# Altium PCB uMultimeter_ExpProbeA_Pcb.PcbDoc
Units mil, origin at the board's own origin, x right, y up, seen from the top; angles counter-clockwise.
Board outline 725 x 1000 mil, 2 copper layers (Top Layer, Bottom Layer); 7 components, 14 nets, 30 pads, 2 vias.
Unrouted connection lines stored in the file: 1.
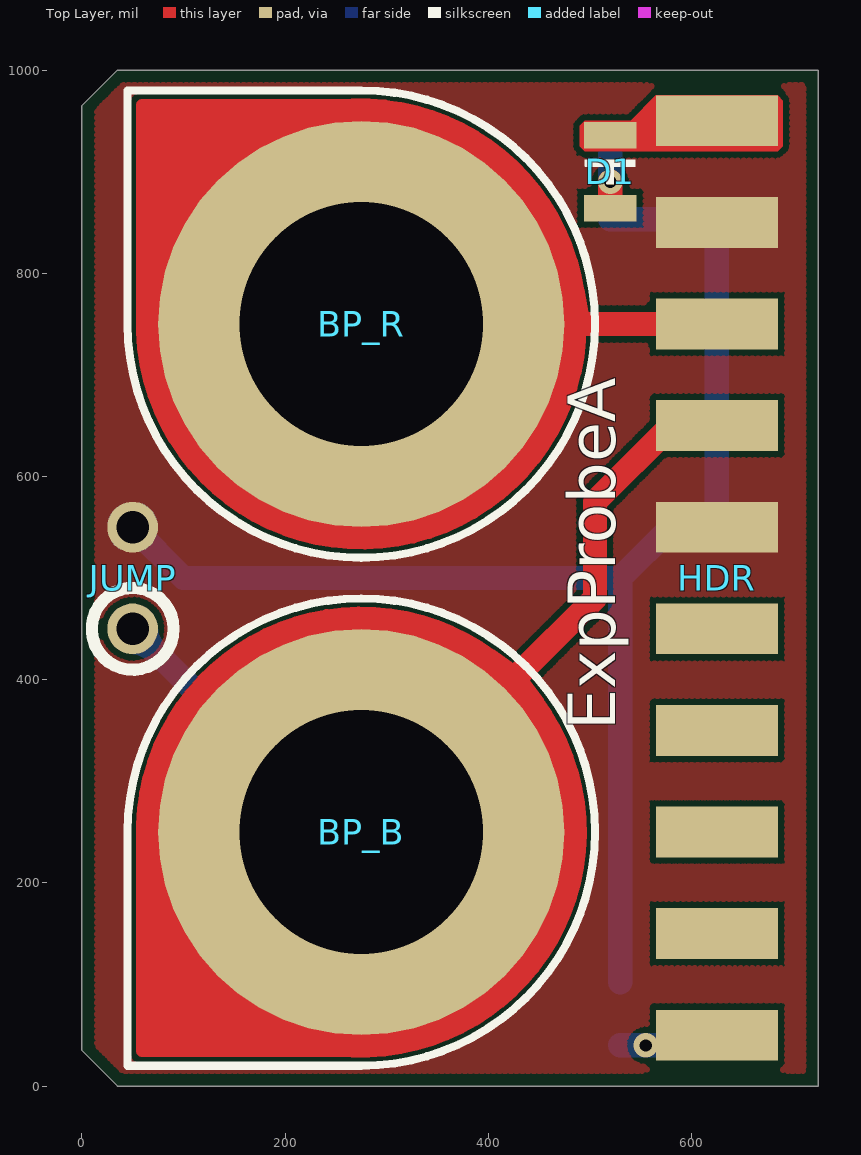
[diagram p0: Top Layer view]
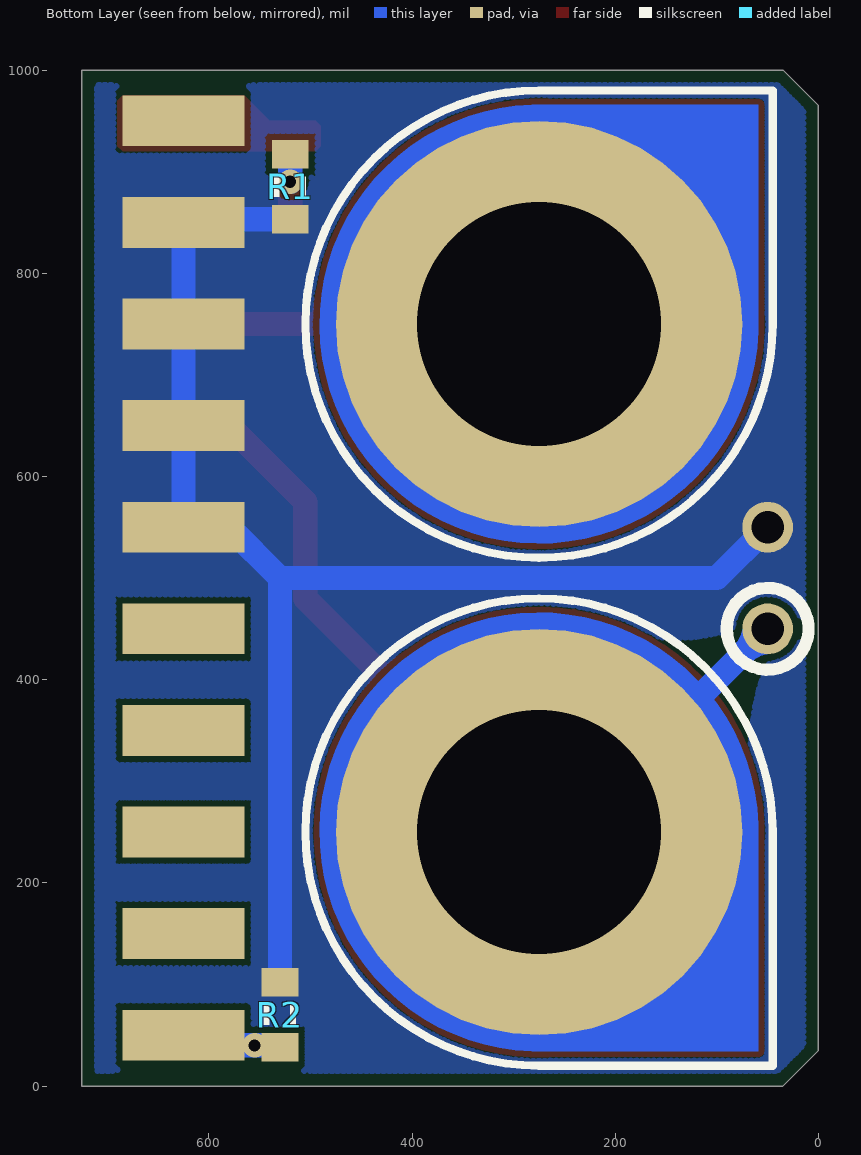
[diagram p1: Bottom Layer view, seen from below]
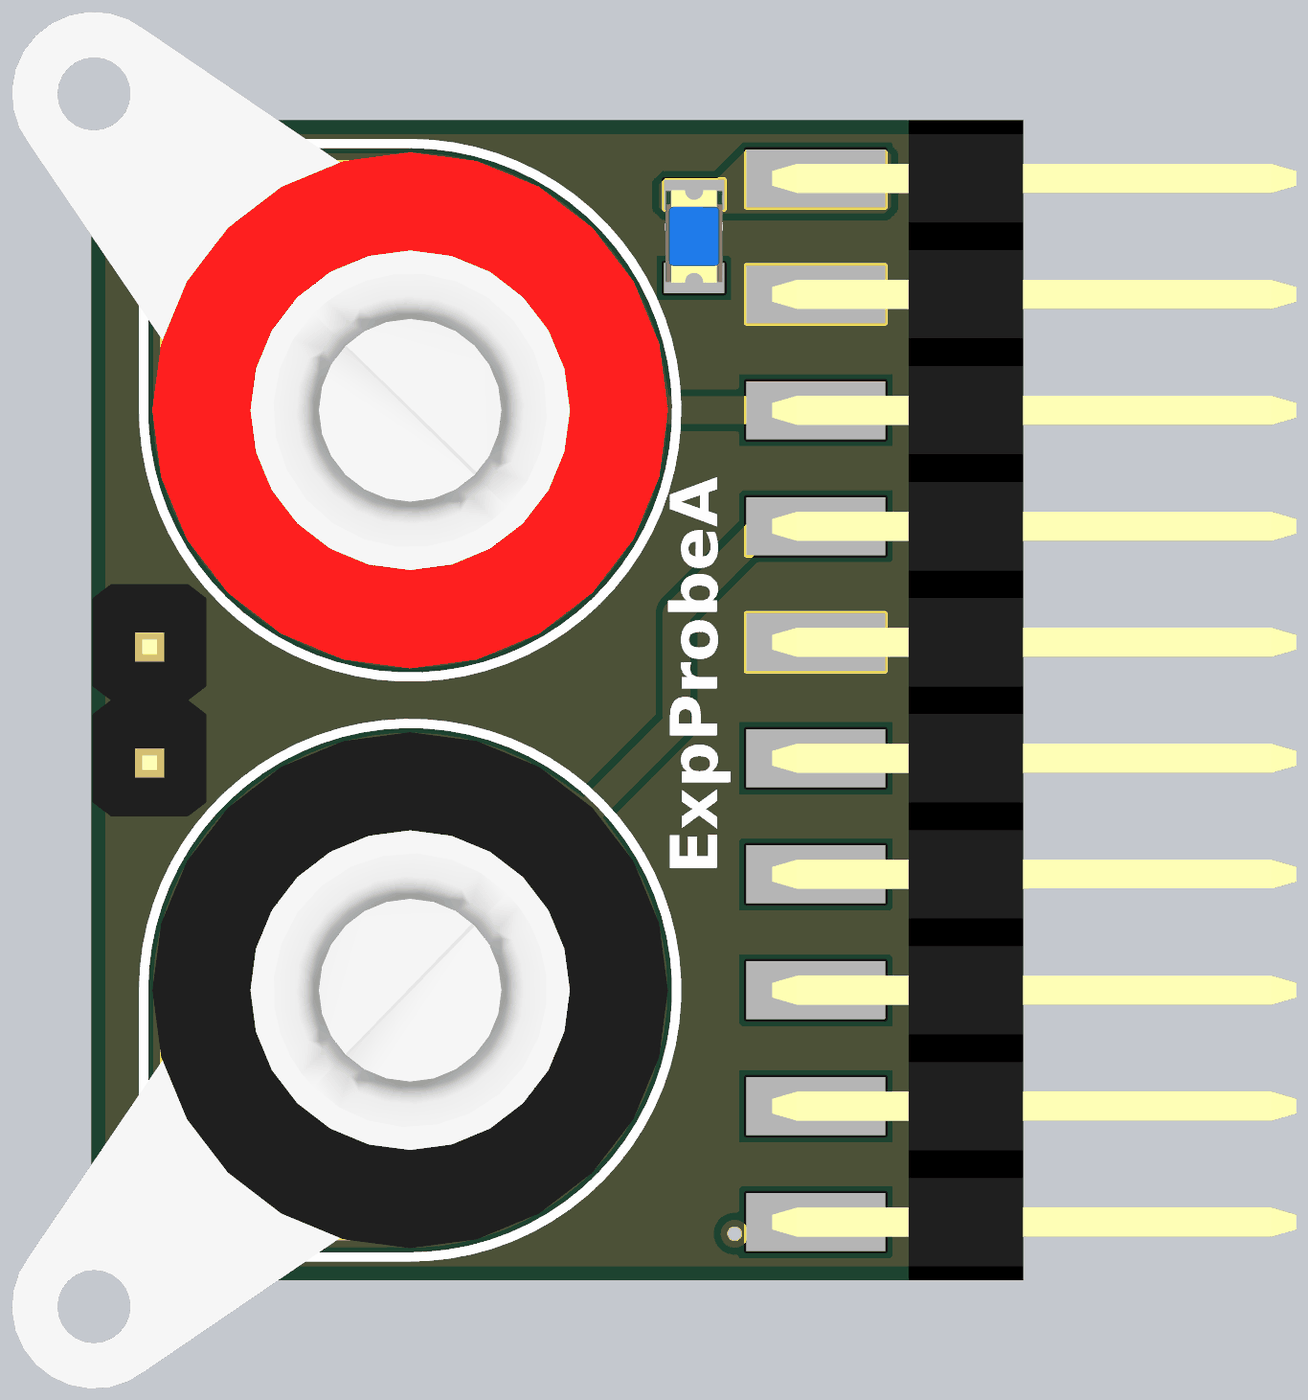
[diagram p2: 3D render of the assembled board from above, using the file's embedded part models]

## Layer stack, top to bottom
Top Solder: solder mask 0.4, Solder Resist, Dk 3.5
Top Layer: signal copper 1.4
Dielectric1: dielectric 12.6, FR-4, Dk 4.8
Bottom Layer: signal copper 1.4
Bottom Solder: solder mask 0.4, Solder Resist, Dk 3.5

## Board outline
0,35 35,0 725,0 725,1000 35,1000 0,965

## Design rules (kind name [scope] priority, off if disabled: settings)
Clearance ClearancePolygon [InPolygon] p1: gap=6
Clearance [All] p2: gap=6
ComponentClearance [All] p1: gap=0 collisioncheckmode=3 verticalgap=0 showdistances=FALSE
Height [All] p1: minheight=0 maxheight=5000 prefheight=500
HoleSize [All] p1: absolutevalues=TRUE maxlimit=200 minlimit=1 maxpercent=80.000 minpercent=20.000
HoleToHoleClearance [All] p1: gap=6 allowstackedmicrovias=TRUE
MinimumSolderMaskSliver [All] p1: minsoldermaskwidth=4
PlaneConnect [All] p1: planeconnectstyle=Direct reliefexpansion=20 reliefentries=4 reliefconductorwidth=20 reliefairgap=10
PolygonConnect [All] p1: connectstyle=Direct reliefconductorwidth=20 reliefentries=4 polygonreliefangle="90 Angle" airgapwidth=10
RoutingVias [All] p1: holewidth=12 width=20 viastyle="Through Hole" minholewidth=12 minwidth=20 maxholewidth=100 maxwidth=200
SilkToSilkClearance [All] p1: silktosilkclearance=0
SilkToSolderMaskClearance SilkscreenOverComponentPads [IsPad] p1: minsilkscreentomaskgap=1 clearancetoexposedcopper=TRUE
SolderMaskExpansion [All] p1: expansion=2
Width [All] p1: maxlimit=64 minlimit=6 preferedwidth=10
22 further rules are at their usual default settings.

## Classes and differential pairs
component class uMultimeter_ExpProbeA_Sch: BP_B BP_R D1 JUMP R1 R2
component class EXP: HDR

## Components (designator, comment, footprint, x,y, rotation, side; value= is the part's Value field where it differs from the comment)
BP_B "BananaPlugs" BananaPlugs_Black 275,250 r225 top
BP_R "BananaPlugs" BananaPlugs_Red 275,750 r135 top
D1 "LED_0805" LED_0805_BLUE 520,900 r270 top
HDR "HDR2x10_2.54" HDR2X10_2.54_180H 625,950 r0 top
JUMP "HDR1x2_2.54" HDR1X2_2.54_180 50,450 r180 top
R1 "Res_0603" RES_0603 520,885 r270 bottom
R2 "Res_0603" RES_0603 530,70 r270 bottom

## Footprints (in the part's own frame and the unit in brackets; to place one, negate y for a bottom-side part, rotate by r counter-clockwise, add the part's x,y. Pads: shape width x height; smd on the part's side, far side on the other; paste and mask are expansions set on the pad)
BananaPlugs_Black [mil]
  round 400 hole 240: 1(0,0)
  Top Layer region: 158.64,-146.59 73.2,-203.22 -28.73,-214.08 -124.19,-176.73 -191.68,-99.58 -216,0 -191.68,99.58 -124.19,176.73 -28.73,214.08 73.2,203.22 158.64,146.59 158.64,146.59 159,146 305,0
  Top Layer lines w12: 158.64,-146.59 cw(c0,0) -216,0 cw(c0,0) 158.64,146.59 ; 159,-146 305,0 159,146
  Bottom Layer region: 158.64,-146.59 73.2,-203.22 -28.73,-214.08 -124.19,-176.73 -191.68,-99.58 -216,0 -191.68,99.58 -124.19,176.73 -28.73,214.08 73.2,203.22 158.64,146.59 158.64,146.59 159,146 305,0
  silkscreen extent -230,-230 325,230, body extent -222,-222 457,222, height 327
BananaPlugs_Red [mil]
  round 400 hole 240: 1(0,0)
  Top Layer region: 158.64,-146.59 73.2,-203.22 -28.73,-214.08 -124.19,-176.73 -191.68,-99.58 -216,0 -191.68,99.58 -124.19,176.73 -28.73,214.08 73.2,203.22 158.64,146.59 158.64,146.59 159,146 305,0
  Top Layer lines w12: 158.64,146.59 ccw(c0,0) -152.74,-152.74 ccw(c0,0) 158.64,-146.59 ; 159,146 305,0 159,-146
  Bottom Layer region: 158.64,-146.59 73.2,-203.22 -28.73,-214.08 -124.19,-176.73 -191.68,-99.58 -216,0 -191.68,99.58 -124.19,176.73 -28.73,214.08 73.2,203.22 158.64,146.59 158.64,146.59 159,146 305,0
  silkscreen extent -230,-230 325,230, body extent -222,-222 457,222, height 327
HDR1X2_2.54_180 [mil]
  round 50 hole 32: 1(0,0) 2(0,-100)
  body extent -49,-150 49,50, height 323
HDR2X10_2.54_180H [mil]
  rect 120x50 smd: 1(0,0) 3(0,-100) 5(0,-200) 7(0,-300) 9(0,-400) 11(0,-500) 13(0,-600) 15(0,-700) 17(0,-800) 19(0,-900)
  rect 120x50 smd far side: 2(0,0) 4(0,-100) 6(0,-200) 8(0,-300) 10(0,-400) 12(0,-500) 14(0,-600) 16(0,-700) 18(0,-800) 20(0,-900)
  body extent -38,-950 415,50, height 100
LED_0805_BLUE [mil]
  rect 26x52 smd: 1(-36,0) 2(36,0)
  silkscreen extent -12,-25 12,24, body extent -40,-25 40,25, height 43
RES_0603 [mil]
  rect 28x36 smd: 1(-32,0) 2(32,0)
  silkscreen extent -10,-16 10,16, body extent -31,-16 32,16, height 20

## Part data
D1: "LED"
HDR: "Header"
JUMP: library part HDR1x2_2.54T, "Header"
R1 R2: "Resistor"

## Via types
v1: diameter 24, hole 12, Top Layer to Bottom Layer, 2 vias

## Nets (pads, with @x,y where several pads share a name; then routed paths per layer and width w, separated by ;. In a path a pad name is that pad's centre, name@x,y a point inside that pad or via, vN(x,y) a via of type N, cw(c..) or ccw(c..) an arc to the next point about the centre after c; other vN are vias at no path point)
3V3: D1.1 HDR.1 HDR.2
EXP_ID1: HDR.19 HDR.20 R2.2 | length 85
  Bottom Layer w24: R2.2@530,40 v1(555,40) HDR.20@615,40
GND: HDR.3 HDR.4 HDR.6 HDR.8 HDR.9 HDR.10 JUMP.2 R1.2 R2.1 | length 1422.4
  Bottom Layer w24: JUMP.2 100,500 530,500 ; R1.2 625,853 HDR.6 HDR.8 HDR.10 580,550 530,500 ; R2.1 530,500
NetD1_2: D1.2 R1.1 | length 53
  Top Layer w24: D1.2 v1(520,890)
  Bottom Layer w24: v1(520,890) R1.1
NetHDR_11: HDR.11
NetHDR_12: HDR.12
NetHDR_13: HDR.13
NetHDR_14: HDR.14
NetHDR_15: HDR.15
NetHDR_16: HDR.16
NetHDR_17: HDR.17
NetHDR_18: HDR.18
PROBE_CH1: BP_R.1 HDR.5 | length 350
  Top Layer w24: BP_R.1 491,750 HDR.5
PROBE_CH2: BP_B.1 HDR.7 JUMP.1 | length 854.2
  Top Layer w24: BP_B.1 427.74,402.74 505,480 505,575 580,650 HDR.7
  Bottom Layer w24: JUMP.1 BP_B.1@250,250

## Polygon pours and split planes (outlines as drawn)
GND on Top Layer "Bottom Layer-No Net" (hatched 45Degree grid 4 track 6, remove dead copper, pour order 2): 710,985 40,985 15,960 15,40 40,15 710,15
GND on Bottom Layer "Bottom Layer-No Net" (hatched 45Degree grid 4 track 6, remove dead copper, pour order 4): 710,985 40,985 15,960 15,40 40,15 710,15

## Other copper
Top Layer:
  region net 3V3: 690,970 685,975 565,975 540,950 495,950 490,945 490,925 495,920 685,920 690,925

## Silkscreen, mask and mechanical layers (free items; w line width, h text height)
Top Overlay:
  circle w12: c50,450 r40.31
  text "ExpProbeA" at 540,350 h80 r90
Bottom Overlay:
  circle w12: c50,450 r40.31
Mechanical 1:
  the board outline again, w2
Drill Drawing:
  text ".Legend" at 870,30 h60